# Altium PCB 数粒机发射板12通道.PcbDoc
Units mm, origin at the board's own origin, x right, y up, seen from the top; angles counter-clockwise.
Board outline 316 x 52 mm, 4 copper layers (TopLayer, MidLayer1, MidLayer2, BottomLayer); 49 components, 49 nets, 122 pads, 18 vias.
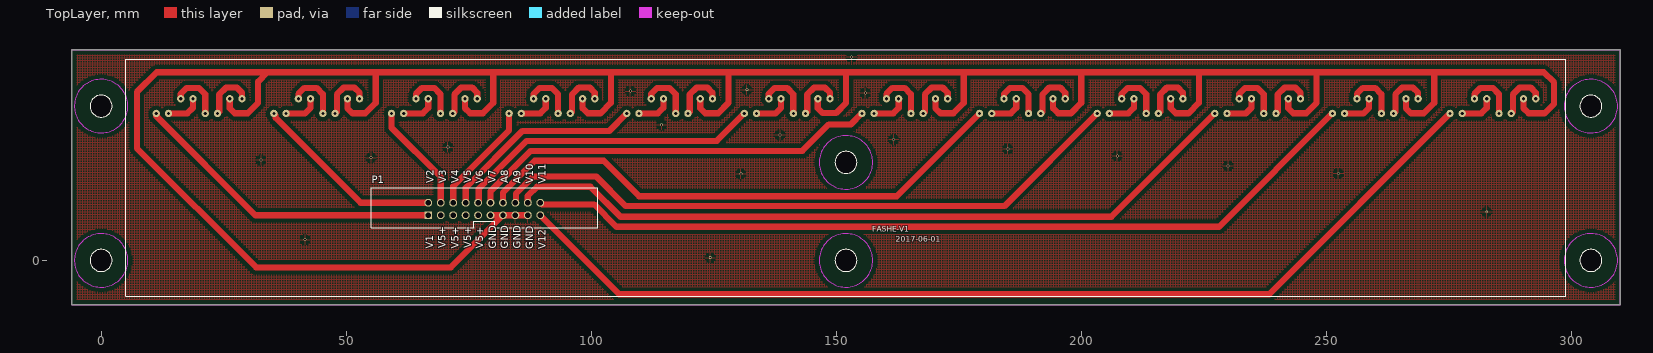
[diagram p0: TopLayer view]
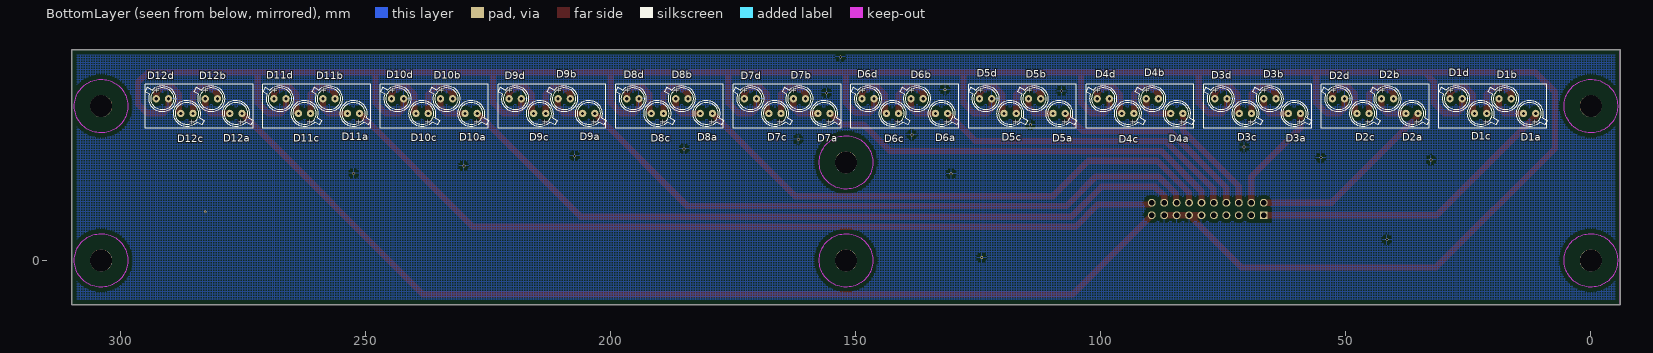
[diagram p1: BottomLayer view, seen from below]

## Layer stack, top to bottom
TopLayer: signal copper 0.0356
Dielectric: core 0.32, FR-4, Dk 4.8
MidLayer1: signal copper 0.0356
Dielectric: dielectric 0.32, FR-4, Dk 4.8
MidLayer2: signal copper 0.0356
Dielectric: dielectric 0.32, FR-4, Dk 4.8
BottomLayer: signal copper 0.0356

## Board outline
-6,43 -6,-9 310,-9 310,43

## Design rules (kind name [scope] priority, off if disabled: settings)
Clearance [All] p1: gap=0.762
PolygonConnect [All] p1: connectstyle=Relief reliefconductorwidth=0.254 reliefentries=4 polygonreliefangle="90 Angle"
RoutingLayers [All] p1: top layer_v5=TRUE mid layer 1_v5=FALSE mid layer 2_v5=FALSE bottom layer_v5=TRUE
RoutingVias RoutingVias_1 [All] p1: holewidth=1 width=2 viastyle="Through Hole" minholewidth=0.711 minwidth=1.27 maxholewidth=1 maxwidth=2
SilkscreenOverComponentPads [All] p1: minsilkscreentomaskgap=0.254
SolderMaskExpansion [All] p1: expansion=0.102
TestPointUsage [All] p1: valid=0 allowmultiple=FALSE
Testpoint [All] p1: side=15 testpointundercomponent=TRUE minsize=1.016 maxsize=2.54 preferedsize=1.524 minholesize=0.508 maxholesize=1.016 preferedholesize=0.813 testpointgrid=0.025 style=1023 order=0123456789
Width [All] p1: maxlimit=4.54 minlimit=0.2 preferedwidth=1
22 further rules are at their usual default settings.

## Components (designator, comment, footprint, x,y, rotation, side; value= is the part's Value field where it differs from the comment)
D1a "红外接收珠子" EL-1KL3 11.255,30 r0 bottom
D1b "红外接收珠子" EL-1KL3 18.745,33 r180 bottom
D1c "红外接收珠子" EL-1KL3 21.255,30 r0 bottom
D1d "红外接收珠子" EL-1KL3 28.745,33 r180 bottom
D2a "红外接收珠子" EL-1KL3 35.255,30 r0 bottom
D2b "红外接收珠子" EL-1KL3 42.745,33 r180 bottom
D2c "红外接收珠子" EL-1KL3 45.255,30 r0 bottom
D2d "红外接收珠子" EL-1KL3 52.745,33 r180 bottom
D3a "红外接收珠子" EL-1KL3 59.255,30 r0 bottom
D3b "红外接收珠子" EL-1KL3 66.745,33 r180 bottom
D3c "红外接收珠子" EL-1KL3 69.255,30 r0 bottom
D3d "红外接收珠子" EL-1KL3 76.745,33 r180 bottom
D4a "红外接收珠子" EL-1KL3 83.255,30 r0 bottom
D4b "红外接收珠子" EL-1KL3 90.745,33 r180 bottom
D4c "红外接收珠子" EL-1KL3 93.255,30 r0 bottom
D4d "红外接收珠子" EL-1KL3 100.745,33 r180 bottom
D5a "红外接收珠子" EL-1KL3 107.255,30 r0 bottom
D5b "红外接收珠子" EL-1KL3 114.745,33 r180 bottom
D5c "红外接收珠子" EL-1KL3 117.255,30 r0 bottom
D5d "红外接收珠子" EL-1KL3 124.745,33 r180 bottom
D6a "红外接收珠子" EL-1KL3 131.255,30 r0 bottom
D6b "红外接收珠子" EL-1KL3 138.745,33 r180 bottom
D6c "红外接收珠子" EL-1KL3 141.255,30 r0 bottom
D6d "红外接收珠子" EL-1KL3 148.745,33 r180 bottom
D7a "红外接收珠子" EL-1KL3 155.255,30 r0 bottom
D7b "红外接收珠子" EL-1KL3 162.745,33 r180 bottom
D7c "红外接收珠子" EL-1KL3 165.255,30 r0 bottom
D7d "红外接收珠子" EL-1KL3 172.745,33 r180 bottom
D8a "红外接收珠子" EL-1KL3 179.255,30 r0 bottom
D8b "红外接收珠子" EL-1KL3 186.745,33 r180 bottom
D8c "红外接收珠子" EL-1KL3 189.255,30 r0 bottom
D8d "红外接收珠子" EL-1KL3 196.745,33 r180 bottom
D9a "红外接收珠子" EL-1KL3 203.255,30 r0 bottom
D9b "红外接收珠子" EL-1KL3 210.745,33 r180 bottom
D9c "红外接收珠子" EL-1KL3 213.255,30 r0 bottom
D9d "红外接收珠子" EL-1KL3 220.745,33 r180 bottom
D10a "红外接收珠子" EL-1KL3 227.255,30 r0 bottom
D10b "红外接收珠子" EL-1KL3 234.745,33 r180 bottom
D10c "红外接收珠子" EL-1KL3 237.255,30 r0 bottom
D10d "红外接收珠子" EL-1KL3 244.745,33 r180 bottom
D11a "红外接收珠子" EL-1KL3 251.255,30 r0 bottom
D11b "红外接收珠子" EL-1KL3 258.745,33 r180 bottom
D11c "红外接收珠子" EL-1KL3 261.255,30 r0 bottom
D11d "红外接收珠子" EL-1KL3 268.745,33 r180 bottom
D12a "红外接收珠子" EL-1KL3 275.255,30 r0 bottom
D12b "红外接收珠子" EL-1KL3 282.745,33 r180 bottom
D12c "红外接收珠子" EL-1KL3 285.255,30 r0 bottom
D12d "红外接收珠子" EL-1KL3 292.745,33 r180 bottom
P1 "Header 10X2" niujiaocha20p 66.758,9.228 r0 top (schematic designator P)

## Footprints (in the part's own frame and the unit in brackets; to place one, negate y for a bottom-side part, rotate by r counter-clockwise, add the part's x,y. Pads: shape width x height; smd on the part's side, far side on the other; paste and mask are expansions set on the pad)
EL-1KL3 [mm]
  round 1.5 hole 0.65: 1(0,0) 2(2.49,0)
  silkscreen extent -2.31,-2.7 3.93,2.7
niujiaocha20p [mm]
  rect 1.6x1.6 hole 1.1: 1(0,0)
  round 1.6 hole 1.1: 2(0,2.54) 3(2.54,0) 4(2.54,2.54) 5(5.08,0) 6(5.08,2.54) 7(7.62,0) 8(7.62,2.54) 9(10.16,0) 10(10.16,2.54) 11(12.7,0) 12(12.7,2.54) 13(15.24,0) 14(15.24,2.54) 15(17.78,0) 16(17.78,2.54) 17(20.32,0) 18(20.32,2.54) 19(22.86,0) 20(22.86,2.54)
  silkscreen extent -11.68,-2.54 34.54,5.59

## Part data
D1a D1b D1c D1d D2a D2b D2c D2d D3a D3b D3c D3d D4a D4b D4c D4d D5a D5b D5c D5d D6a D6b D6c D6d D7a D7b D7c D7d D8a D8b D8c D8d D9a D9b D9c D9d D10a D10b D10c D10d D11a D11b D11c D11d D12a D12b D12c D12d: library part LED0, "PD15-21B/TR8"
P1: "Header, 10-Pin, Dual row"

## Free pads (board coordinates)
  round 4.5 hole 4.5 unplated: 1(0,31.5) 2(0,0) 2(152,0) 2(152,20) 5(304,31.5) 6(304,0)

## Via types
v1: diameter 0.6, hole 0.4, TopLayer to BottomLayer, 17 vias
v2: diameter 0.508, hole 0.254, TopLayer to BottomLayer, 1 vias

## Nets (pads, with @x,y where several pads share a name; then routed paths per layer and width w, separated by ;. In a path a pad name is that pad's centre, name@x,y a point inside that pad or via, vN(x,y) a via of type N, cw(c..) or ccw(c..) an arc to the next point about the centre after c; other vN are vias at no path point)
GND: D1d.2 D2d.2 D3d.2 D4d.2 D5d.2 D6d.2 D7d.2 D8d.2 D9d.2 D10d.2 D11d.2 D12d.2 P1.11 P1.13 P1.15 P1.17 | length 582.6
  TopLayer w1.27: D1d.2 26.255,31.059 27.28,30.034 29.91,30.034 32.02,32.144 32.02,36.509 33.93,38.419 ; D2d.2 50.255,31.059 51.28,30.034 53.91,30.034 56.02,32.144 56.02,38.419 ; D3d.2 74.255,31.059 75.28,30.034 77.91,30.034 80.02,32.144 80.02,38.419 ; P1.11 P1.13 ; P1.17 P1.15 P1.13 ; D4d.2 98.255,31.059 99.28,30.034 101.91,30.034 104.02,32.144 104.02,38.419 ; D5d.2 122.255,31.059 123.28,30.034 125.91,30.034 128.02,32.144 128.02,38.419 ; D6d.2 146.255,31.059 147.234,30.08 149.956,30.08 152.02,32.144 152.02,38.419 ; D7d.2@170.255,33 170.255,31.059 171.28,30.034 173.91,30.034 176.02,32.144 176.02,38.419 ; D8d.2 194.255,31.059 195.28,30.034 197.91,30.034 200.02,32.144 200.02,38.419 ; D9d.2 218.255,31.059 219.28,30.034 221.91,30.034 224.02,32.144 224.02,38.419 ; D10d.2 242.255,31.059 243.28,30.034 245.91,30.034 248.02,32.144 248.02,38.419 ; D11d.2 266.255,31.059 267.28,30.034 269.91,30.034 272.02,32.144 272.02,38.419 ; D12d.2 290.255,31.059 291.28,30.034 294.554,30.034 296.495,31.975 296.495,36.329 294.405,38.419 224.02,38.419 ; 33.93,38.419 56.02,38.419 ; 33.93,38.419 11.354,38.419 7.305,34.37 7.305,22.905 31.625,-1.415 71.355,-1.415 P1.13 ; 56.02,38.419 152.02,38.419 ; 152.02,38.419 224.02,38.419
  other v1: 124.3,0.57 41.605,4.25 130.535,17.685 252.46,17.749 229.99,19.304 32.635,20.499 55.11,20.974 207.395,21.334 185.045,22.769 70.765,23.129 161.735,24.679 138.545,25.609 114.39,27.684 155.95,34.179 108.025,34.569 131.79,34.829 153.13,41.525
  other v2: 282.74,9.91
NetD1a_2: D1a.2 D1b.1 | length 7.3
  TopLayer w1.27: D1a.2 17.621,30 18.745,31.124 D1b.1
NetD1b_2: D1b.2 D1c.1 | length 10.9
  TopLayer w1.27: D1b.2 16.255,33.984 17.48,35.209 19.96,35.209 21.255,33.914 D1c.1
NetD1c_2: D1c.2 D1d.1 | length 10.9
  TopLayer w1.27: D1c.2 24.108,30.363 24.108,33.889 25.508,35.289 27.695,35.289 28.745,34.239 D1d.1
NetD2a_2: D2a.2 D2b.1 | length 7.3
  TopLayer w1.27: D2a.2 41.621,30 42.745,31.124 D2b.1
NetD2b_2: D2b.2 D2c.1 | length 10.9
  TopLayer w1.27: D2b.2 40.255,33.984 41.48,35.209 43.96,35.209 45.255,33.914 D2c.1@45.255,30
NetD2c_2: D2c.2 D2d.1 | length 10.9
  TopLayer w1.27: D2c.2@47.745,30 48.108,30.363 48.108,33.889 49.508,35.289 51.695,35.289 52.745,34.239 D2d.1
NetD3a_2: D3a.2 D3b.1 | length 7.3
  TopLayer w1.27: D3a.2 65.621,30 66.745,31.124 D3b.1
NetD3b_2: D3b.2 D3c.1 | length 10.9
  TopLayer w1.27: D3b.2 64.255,33.984 65.48,35.209 67.96,35.209 69.255,33.914 D3c.1
NetD3c_2: D3c.2 D3d.1 | length 10.9
  TopLayer w1.27: D3c.2 72.108,30.363 72.108,33.889 73.508,35.289 75.695,35.289 76.745,34.239 D3d.1
NetD4a_2: D4a.2 D4b.1 | length 7.3
  TopLayer w1.27: D4a.2 89.621,30 90.745,31.124 D4b.1
NetD4b_2: D4b.2 D4c.1 | length 10.9
  TopLayer w1.27: D4b.2 88.255,33.984 89.48,35.209 91.96,35.209 93.255,33.914 D4c.1
NetD4c_2: D4c.2 D4d.1 | length 10.9
  TopLayer w1.27: D4c.2 96.108,30.363 96.108,33.889 97.508,35.289 99.695,35.289 100.745,34.239 D4d.1
NetD5a_2: D5a.2 D5b.1 | length 7.3
  TopLayer w1.27: D5a.2 113.621,30 114.745,31.124 D5b.1
NetD5b_2: D5b.2 D5c.1 | length 10.9
  TopLayer w1.27: D5b.2 112.255,33.984 113.48,35.209 115.96,35.209 117.255,33.914 D5c.1
NetD5c_2: D5c.2 D5d.1 | length 10.9
  TopLayer w1.27: D5c.2 120.108,30.363 120.108,33.889 121.508,35.289 123.695,35.289 124.745,34.239 D5d.1
NetD6a_2: D6a.2 D6b.1 | length 7.3
  TopLayer w1.27: D6a.2 137.621,30 138.745,31.124 D6b.1
NetD6b_2: D6b.2 D6c.1 | length 10.9
  TopLayer w1.27: D6b.2 136.255,33.984 137.48,35.209 139.96,35.209 141.255,33.914 D6c.1
NetD6c_2: D6c.2 D6d.1 | length 10.9
  TopLayer w1.27: D6c.2@143.745,30 144.108,30.363 144.108,33.889 145.508,35.289 147.695,35.289 148.745,34.239 D6d.1
NetD7a_2: D7a.2 D7b.1 | length 7.3
  TopLayer w1.27: D7a.2 161.621,30 162.745,31.124 D7b.1
NetD7b_2: D7b.2 D7c.1 | length 10.9
  TopLayer w1.27: D7b.2@160.255,33 160.255,33.984 161.48,35.209 163.96,35.209 165.255,33.914 D7c.1
NetD7c_2: D7c.2 D7d.1 | length 10.9
  TopLayer w1.27: D7c.2 168.108,30.363 168.108,33.889 169.508,35.289 171.695,35.289 172.745,34.239 D7d.1
NetD8a_2: D8a.2 D8b.1 | length 7.3
  TopLayer w1.27: D8a.2 185.621,30 186.745,31.124 D8b.1
NetD8b_2: D8b.2 D8c.1 | length 10.9
  TopLayer w1.27: D8b.2 184.255,33.984 185.48,35.209 187.96,35.209 189.255,33.914 D8c.1
NetD8c_2: D8c.2 D8d.1 | length 10.9
  TopLayer w1.27: D8c.2 192.108,30.363 192.108,33.889 193.508,35.289 195.695,35.289 196.745,34.239 D8d.1
NetD9a_2: D9a.2 D9b.1 | length 7.3
  TopLayer w1.27: D9a.2 209.621,30 210.745,31.124 D9b.1
NetD9b_2: D9b.2 D9c.1 | length 10.9
  TopLayer w1.27: D9b.2 208.255,33.984 209.48,35.209 211.96,35.209 213.255,33.914 D9c.1
NetD9c_2: D9c.2 D9d.1 | length 10.9
  TopLayer w1.27: D9c.2 216.108,30.363 216.108,33.889 217.508,35.289 219.695,35.289 220.745,34.239 D9d.1
NetD10a_2: D10a.2 D10b.1 | length 7.3
  TopLayer w1.27: D10a.2 233.621,30 234.745,31.124 D10b.1
NetD10b_2: D10b.2 D10c.1 | length 10.9
  TopLayer w1.27: D10b.2 232.255,33.984 233.48,35.209 235.96,35.209 237.255,33.914 D10c.1
NetD10c_2: D10c.2 D10d.1 | length 10.9
  TopLayer w1.27: D10c.2 240.108,30.363 240.108,33.889 241.508,35.289 243.695,35.289 244.745,34.239 D10d.1
NetD11a_2: D11a.2 D11b.1 | length 7.3
  TopLayer w1.27: D11a.2 257.621,30 258.745,31.124 D11b.1
NetD11b_2: D11b.2 D11c.1 | length 10.9
  TopLayer w1.27: D11b.2 256.255,33.984 257.48,35.209 259.96,35.209 261.255,33.914 D11c.1
NetD11c_2: D11c.2 D11d.1 | length 10.9
  TopLayer w1.27: D11c.2 264.108,30.363 264.108,33.889 265.508,35.289 267.695,35.289 268.745,34.239 D11d.1
NetD12a_2: D12a.2 D12b.1 | length 7.3
  TopLayer w1.27: D12a.2 281.621,30 282.745,31.124 D12b.1
NetD12b_2: D12b.2 D12c.1 | length 10.9
  TopLayer w1.27: D12b.2 280.255,33.984 281.48,35.209 283.96,35.209 285.255,33.914 D12c.1
NetD12c_2: D12c.2 D12d.1 | length 10.9
  TopLayer w1.27: D12c.2 288.108,30.363 288.108,33.889 289.508,35.289 291.695,35.289 292.745,34.239 D12d.1
VOUT1: D1a.1 P1.1 | length 64.4
  TopLayer w1.27: D1a.1 11.23,29.975 11.23,29.479 31.481,9.228 P1.1
VOUT2: D2a.1 P1.2 | length 39.4
  TopLayer w1.27: D2a.1 35.598,29.657 35.598,29.111 52.941,11.768 P1.2
VOUT3: D3a.1 P1.4 | length 22.4
  TopLayer w1.27: D3a.1 59.255,27.089 69.298,17.046 P1.4
VOUT4: D4a.1 P1.6 | length 23
  TopLayer w1.27: P1.6 71.838,15.157 83.255,26.574 D4a.1
VOUT5: D5a.1 P1.8 | length 42.2
  TopLayer w1.27: P1.8 74.4,11.79 74.4,14.846 85.972,26.417 103.672,26.417 D5a.1
VOUT6: D6a.1 P1.10 | length 63.5
  TopLayer w1.27: P1.10 77.045,11.895 77.045,14.617 86.813,24.385 125.64,24.385 D6a.1
VOUT7: D7a.1 P1.12 | length 84.7
  TopLayer w1.27: P1.12 79.458,14.156 87.655,22.353 143.101,22.353 148.515,27.768 153.023,27.768 D7a.1
VOUT8: D8a.1 P1.14 | length 112
  TopLayer w1.27: P1.14 81.998,13.822 88.497,20.321 102.579,20.321 109.779,13.121 162.376,13.121 D8a.1
VOUT9: D9a.1 P1.16 | length 132.3
  TopLayer w1.27: P1.16 84.645,11.875 84.645,13.596 88.179,17.13 101.03,17.13 107.071,11.089 184.344,11.089 D9a.1
VOUT10: D10a.1 P1.18 | length 153.6
  TopLayer w1.27: P1.18 87.078,13.155 88.968,15.045 99.855,15.045 105.989,8.911 206.166,8.911 D10a.1
VOUT11: D11a.1 P1.20 | length 173.2
  TopLayer w1.27: P1.20 89.961,11.425 100.601,11.425 105.147,6.879 228.134,6.879 D11a.1
VOUT12: D12a.1 P1.19 | length 207.6
  TopLayer w1.27: P1.19 105.725,-6.879 238.376,-6.879 D12a.1
pads on no net: P1.3 P1.5 P1.7 P1.9

## Polygon pours and split planes (outlines as drawn)
GND on TopLayer "TopOverlay-No Net" (hatched 90Degree grid 0.508 track 0.254, remove dead copper, pour order 1000): -6,43 -6,-9 310,-9 310,43
GND on TopLayer "TopLayer-GND 2" (hatched 90Degree grid 0.508 track 0.508, remove dead copper, pour order 1002): 140.503,10.688
GND on BottomLayer "TopOverlay-No Net" (hatched 90Degree grid 0.508 track 0.254, remove dead copper, pour order 1001): -6,43 -6,-9 310,-9 310,43
GND on BottomLayer "BottomLayer-GND 2" (hatched 90Degree grid 0.508 track 0.508, remove dead copper, pour order 1006): 292.159,24.642
GND on BottomLayer "BottomLayer-GND 3" (hatched 90Degree grid 0.508 track 0.508, remove dead copper, pour order 1007): -6.941,8.773

## Keep-outs
KeepOutLayer:
  circle w0.254: c152,20 r5.461
  circle w0.254: c152,0 r5.461
  circle w0.254: c304,31.5 r5.461
  circle w0.254: c304,0 r5.461
  circle w0.254: c0,0 r5.461
  circle w0.254: c0,31.5 r5.461
  lines w0.254: -6,-9 -6,43 310,43 310,-9 -6,-9

## Silkscreen, mask and mechanical layers (free items; w line width, h text height)
TopOverlay:
  circle w0.254: c0,31.5 r2.25
  circle w0.254: c0,0 r2.25
  circle w0.254: c152,0 r2.25
  circle w0.254: c152,20 r2.25
  circle w0.254: c304,31.5 r2.25
  circle w0.254: c304,0 r2.25
  lines w0.254: 5.064,-7.347 5.064,41.013 ; 5.064,41.004 298.865,41.004 298.865,-7.356 5.072,-7.356
  text "V2" at 67.859,15.783 h1.5 r90
  text "V3" at 70.394,15.783 h1.5 r90
  text "V4" at 72.979,15.783 h1.5 r90
  text "V5" at 75.509,15.728 h1.5 r90
  text "V7" at 80.574,15.728 h1.5 r90
  text "A8" at 83.074,15.728 h1.5 r90
  text "V6" at 77.984,15.698 h1.5 r90
  text "V10" at 88.194,15.698 h1.5 r90
  text "A9" at 85.604,15.673 h1.5 r90
  text "V11" at 90.724,15.673 h1.5 r90
  text "FASHE-V1" at 157.335,5.846 h1.1
  text "2017-06-01" at 162.18,3.844 h1.1
  text "V5+" at 70.364,2.488 h1.5 r90
  text "V5+" at 75.509,2.458 h1.5 r90
  text "V1" at 67.804,2.433 h1.5 r90
  text "V5+" at 72.949,2.433 h1.5 r90
  text "V5+" at 78.014,2.403 h1.5 r90
  text "GND" at 80.599,2.373 h1.5 r90
  text "GND" at 83.104,2.373 h1.5 r90
  text "GND" at 85.634,2.348 h1.5 r90
  text "GND" at 88.219,2.318 h1.5 r90
  text "V12" at 90.724,2.318 h1.5 r90
BottomOverlay:
  lines w0.254: 9,27 31,27 31,36 9,36 9,27 ; 33,27 55,27 55,36 33,36 33,27 ; 57,27 79,27 79,36 57,36 57,27 ; 81,27 103,27 103,36 81,36 81,27 ; 105,27 127,27 127,36 105,36 105,27 ; 129,27 151,27 151,36 129,36 129,27 ; 153,27 175,27 175,36 153,36 153,27 ; 177,27 199,27 199,36 177,36 177,27 ; 201,27 223,27 223,36 201,36 201,27 ; 225,27 247,27 247,36 225,36 225,27 ; 249,27 271,27 271,36 249,36 249,27 ; 273,27 295,27 295,36 273,36 273,27
Mechanical1:
  the board outline again, w0.254

## Text inside footprints (layer, text, board x,y; h text height)
D1a: BottomOverlay "+" at 11.89,28.94 h1.2 r90
D1b: BottomOverlay "+" at 18.11,34.06 h1.2 r270
D1c: BottomOverlay "+" at 21.89,28.94 h1.2 r90
D1d: BottomOverlay "+" at 28.11,34.06 h1.2 r270
D2a: BottomOverlay "+" at 35.89,28.94 h1.2 r90
D2b: BottomOverlay "+" at 42.11,34.06 h1.2 r270
D2c: BottomOverlay "+" at 45.89,28.94 h1.2 r90
D2d: BottomOverlay "+" at 52.11,34.06 h1.2 r270
D3a: BottomOverlay "+" at 59.89,28.94 h1.2 r90
D3b: BottomOverlay "+" at 66.11,34.06 h1.2 r270
D3c: BottomOverlay "+" at 69.89,28.94 h1.2 r90
D3d: BottomOverlay "+" at 76.11,34.06 h1.2 r270
D4a: BottomOverlay "+" at 83.89,28.94 h1.2 r90
D4b: BottomOverlay "+" at 90.11,34.06 h1.2 r270
D4c: BottomOverlay "+" at 93.89,28.94 h1.2 r90
D4d: BottomOverlay "+" at 100.11,34.06 h1.2 r270
D5a: BottomOverlay "+" at 107.89,28.94 h1.2 r90
D5b: BottomOverlay "+" at 114.11,34.06 h1.2 r270
D5c: BottomOverlay "+" at 117.89,28.94 h1.2 r90
D5d: BottomOverlay "+" at 124.11,34.06 h1.2 r270
D6a: BottomOverlay "+" at 131.89,28.94 h1.2 r90
D6b: BottomOverlay "+" at 138.11,34.06 h1.2 r270
D6c: BottomOverlay "+" at 141.89,28.94 h1.2 r90
D6d: BottomOverlay "+" at 148.11,34.06 h1.2 r270
D7a: BottomOverlay "+" at 155.89,28.94 h1.2 r90
D7b: BottomOverlay "+" at 162.11,34.06 h1.2 r270
D7c: BottomOverlay "+" at 165.89,28.94 h1.2 r90
D7d: BottomOverlay "+" at 172.11,34.06 h1.2 r270
D8a: BottomOverlay "+" at 179.89,28.94 h1.2 r90
D8b: BottomOverlay "+" at 186.11,34.06 h1.2 r270
D8c: BottomOverlay "+" at 189.89,28.94 h1.2 r90
D8d: BottomOverlay "+" at 196.11,34.06 h1.2 r270
D9a: BottomOverlay "+" at 203.89,28.94 h1.2 r90
D9b: BottomOverlay "+" at 210.11,34.06 h1.2 r270
D9c: BottomOverlay "+" at 213.89,28.94 h1.2 r90
D9d: BottomOverlay "+" at 220.11,34.06 h1.2 r270
D10a: BottomOverlay "+" at 227.89,28.94 h1.2 r90
D10b: BottomOverlay "+" at 234.11,34.06 h1.2 r270
D10c: BottomOverlay "+" at 237.89,28.94 h1.2 r90
D10d: BottomOverlay "+" at 244.11,34.06 h1.2 r270
D11a: BottomOverlay "+" at 251.89,28.94 h1.2 r90
D11b: BottomOverlay "+" at 258.11,34.06 h1.2 r270
D11c: BottomOverlay "+" at 261.89,28.94 h1.2 r90
D11d: BottomOverlay "+" at 268.11,34.06 h1.2 r270
D12a: BottomOverlay "+" at 275.89,28.94 h1.2 r90
D12b: BottomOverlay "+" at 282.11,34.06 h1.2 r270
D12c: BottomOverlay "+" at 285.89,28.94 h1.2 r90
D12d: BottomOverlay "+" at 292.11,34.06 h1.2 r270